# EAGLE board 555_theremin (EAGLE 5.07)
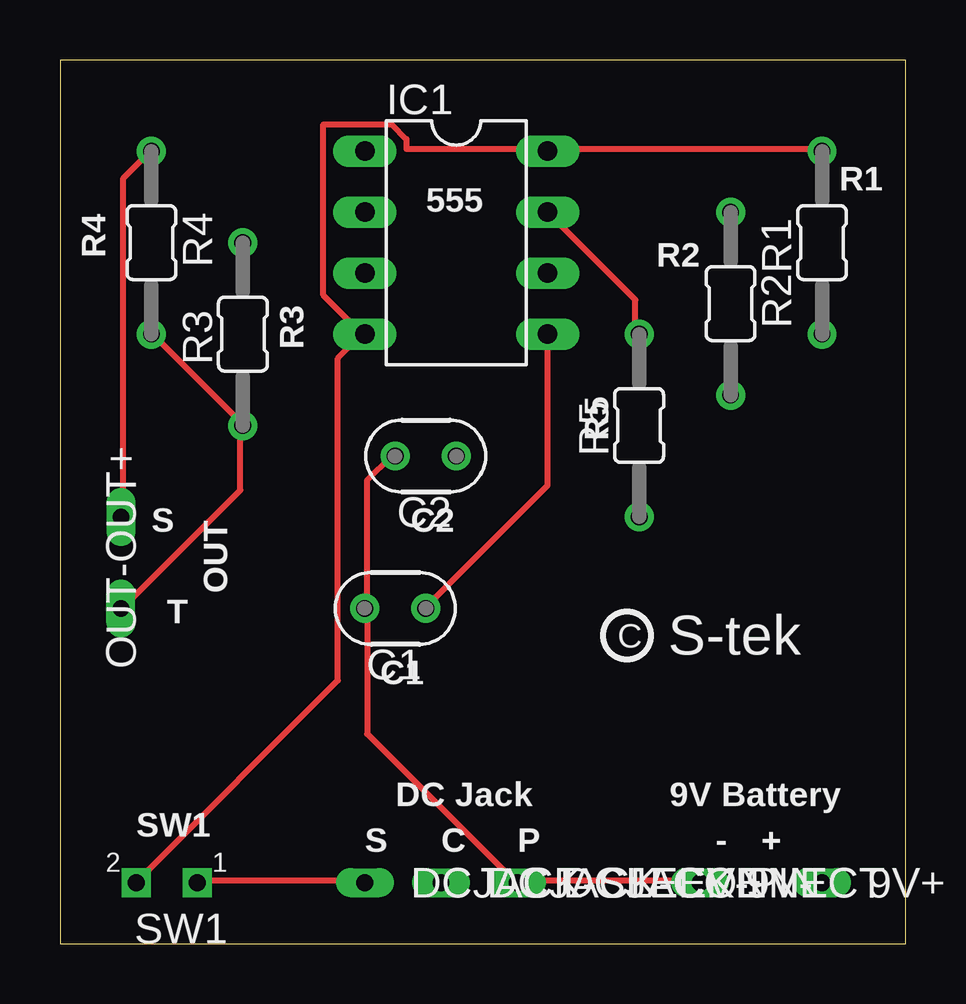
[diagram p0: board, top side]
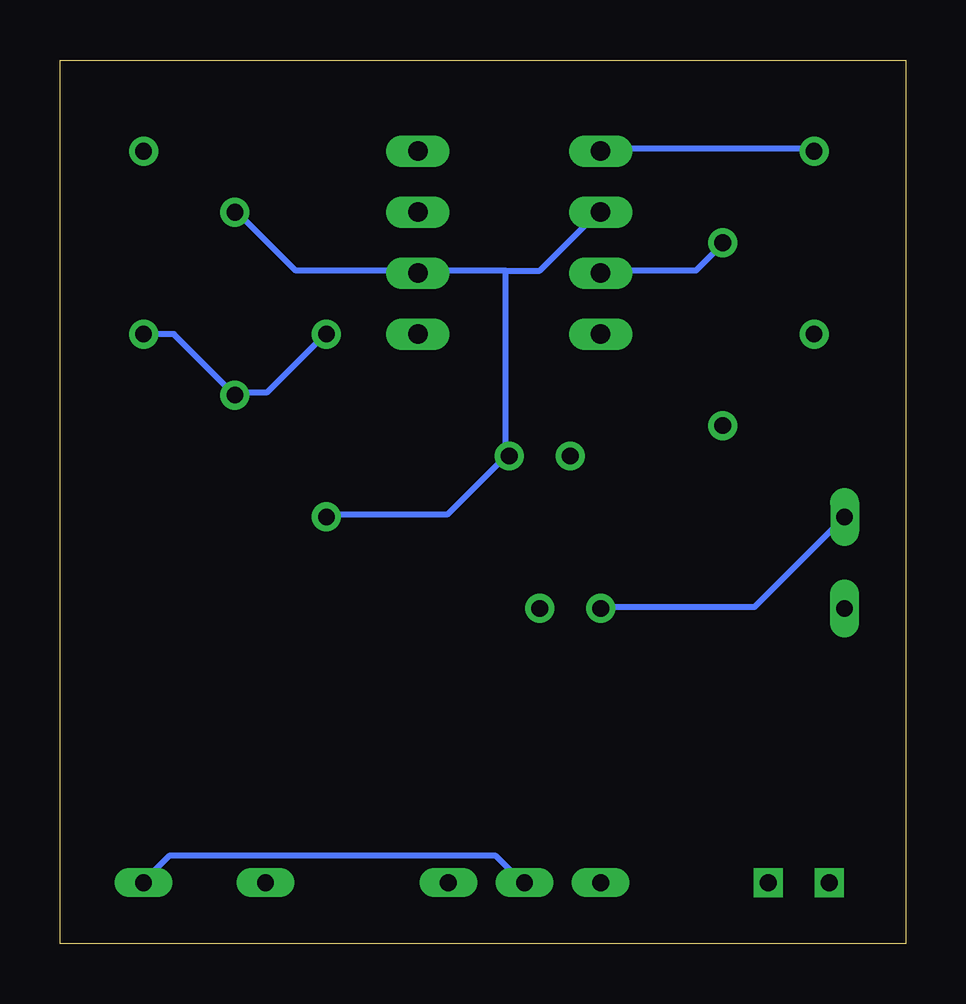
[diagram p1: board, bottom side, seen from below]

Size 35.23 x 36.82 mm. Coordinates in mm from the lower left corner, seen from the top.
Outline: 0,0 35.23,0 35.23,36.82 0,36.82 0,0
Copper layers (1*16): Top 0.035mm / dielectric 1.5mm / Bottom 0.035mm
Design rules "default": minimum track width 10mil, minimum drill 24mil, track to track 8mil, track to pad 8mil, pad to pad 8mil, via to via 8mil, smd to smd 8mil, copper to edge 40mil, drill to drill 8mil, minimum pad ring 10mil, minimum via ring 8mil, stop-mask expansion 4mil, vias tented up to drill 0mil, thermal gap 10mil

## Footprints (pad centres in the part's own frame; a part is rotated, then mirrored left to right if it is on the bottom)
LONG = drill 0.7 long: 1 0,0
050X030_025 = drill 0.7 round: 1 -1.27,0; 2 1.27,0
DIL-08 = drill 0.813 long: 1 -3.81,-3.81; 2 -1.27,-3.81; 3 1.27,-3.81; 4 3.81,-3.81; 5 3.81,3.81; 6 1.27,3.81; 7 -1.27,3.81; 8 -3.81,3.81
R0204/3 = drill 0.7 round: 1 -3.81,0; 2 3.81,0
SPST = drill 0.7 square: 1 -1.27,0; 2 1.27,0

## Placement (x,y rotation side)
9V+  [LONG]  31.75,2.54 0 top
9V-  [LONG]  26.67,2.54 0 top
C1  [050X030_025]  13.97,13.97 180 top
C2  [050X030_025]  15.24,20.32 180 top
DCJACK-CONNECT  [LONG]  15.88,2.54 0 top
DCJACK-PIN  [LONG]  19.05,2.54 0 top
DCJACK-SLEEVE  [LONG]  12.7,2.54 0 top
IC1  NE555  [DIL-08]  16.51,29.21 270 top
OUT+  [LONG]  2.54,13.97 90 top
OUT-  [LONG]  2.54,17.78 270 top
R1  3MM.3  [R0204/3]  31.75,29.21 90 top
R2  3MM.3  [R0204/3]  27.94,26.67 270 top
R3  3MM.3  [R0204/3]  7.62,25.4 90 top
R4  3MM.3  [R0204/3]  3.81,29.21 270 top
R5  3MM.3  [R0204/3]  24.13,21.59 90 top
SW1  SPST  [SPST]  4.45,2.54 180 top

## Library data of the parts
9V+ 9V- DCJACK-CONNECT DCJACK-PIN DCJACK-SLEEVE OUT+ OUT- = gm-supply
C1 C2 = gm-caps-ceramic
IC1 = st-microelectronics
R1-R5 = gm-resistors
SW1 = gm-switches

## Nets
+9V: IC1.4 IC1.8 R1.2 SW1.2
GND: 9V-.1 C1.2 C2.2 DCJACK-PIN.1 IC1.1 OUT-.1 R4.1
N$2: OUT+.1 R3.1 R4.2
N$3: C1.1 IC1.5
N$4: IC1.3 R3.2
N$6: IC1.7 R1.1 R2.2 R5.2
N$8: C2.1 IC1.2 IC1.6 R2.1 R5.1
N$12: 9V+.1 DCJACK-CONNECT.1
N$13: DCJACK-SLEEVE.1 SW1.1

## Tracks (layer width: path | path; a pad name or v marks a point on that pad's centre or on a via)
+9V
  Top 0.254: 20.32,33.12 31.7,33.12 R1.2 | 12.6,25.4 11.58,24.38 11.58,10.97 3.25,2.64 SW1.2 | 20.32,33.12 14.43,33.12 14.43,33.53 13.82,34.14 10.97,34.14 10.97,27.03 12.6,25.4 | 20.32,33.12 IC1.8 | 12.6,25.4 IC1.4
GND
  Top 0.254: 9V-.1 26.62,2.64 19.1,2.64 DCJACK-PIN.1 18.9,2.64 12.8,8.74 12.8,13.82 C1.2 12.8,14.02 12.8,19.3 13.82,20.32 C2.2 | R4.1 3.66,32.92 2.64,31.9 2.64,17.88 OUT-.1
  Bottom 0.254: R4.1 3.86,33.12 12.6,33.12 IC1.1 | OUT-.1 6.3,14.02 12.6,14.02 C1.2
N$2
  Top 0.254: OUT+.1 2.64,14.02 7.52,18.9 7.52,21.54 R3.1 7.52,21.74 3.86,25.4 R4.2
N$3
  Top 0.254: IC1.5 20.32,19.1 15.24,14.02 C1.1
N$4
  Bottom 0.254: R3.2 7.72,29.06 8.74,28.04 12.6,28.04 IC1.3
N$6
  Top 0.254: IC1.7 23.98,26.82 23.98,25.4 R5.2
  Bottom 0.254: R1.1 30.48,25.4 R2.2 27.84,22.96 26.62,22.96 24.18,25.4 R5.2
N$8
  Bottom 0.254: 16.66,20.32 19.1,17.88 23.98,17.88 R5.1 | 20.32,28.04 25.4,28.04 27.84,30.48 R2.1 | 16.66,28.04 20.32,28.04 | 16.66,28.04 15.24,28.04 12.8,30.48 IC1.2 | 20.32,28.04 IC1.6 | 16.66,20.32 16.66,28.04 | C2.1 16.66,20.32
N$12
  Bottom 0.254: DCJACK-CONNECT.1 16.05,2.64 17.07,3.66 30.68,3.66 31.7,2.64 9V+.1
N$13
  Top 0.254: SW1.1 5.89,2.64 12.6,2.64 DCJACK-SLEEVE.1

## Text on the board
tPlace: R1 | 555 | R4 | R2 | R3 | R5 | S | C2 | OUT | T | C | S-tek | C1 | DC Jack | 9V Battery | SW1 | S | C | P | - | +